# Altium PCB MaiChe.PcbDoc
Units mm, origin at the board's own origin, x right, y up, seen from the top; angles counter-clockwise.
Board outline 152.4 x 101.6 mm, 2 copper layers (Top Layer, Bottom Layer); 24 components, 22 nets, 92 pads, 4 vias.
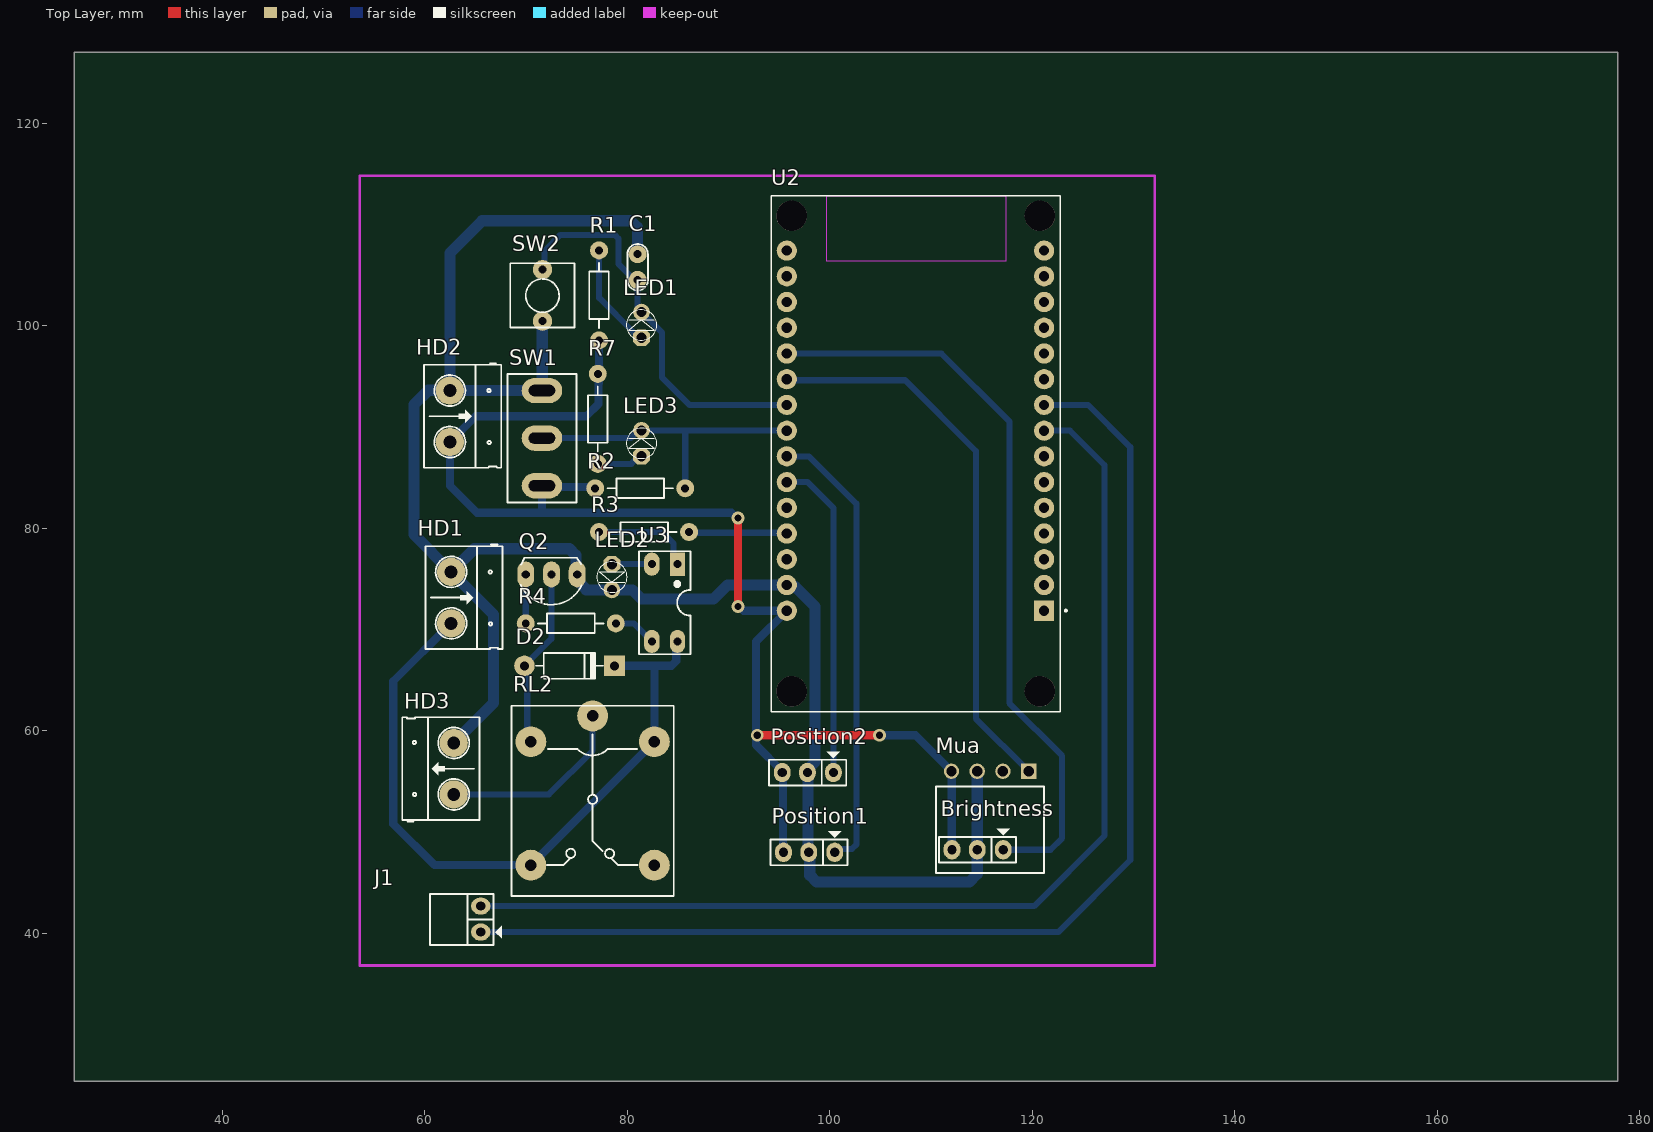
[diagram p0: Top Layer view]
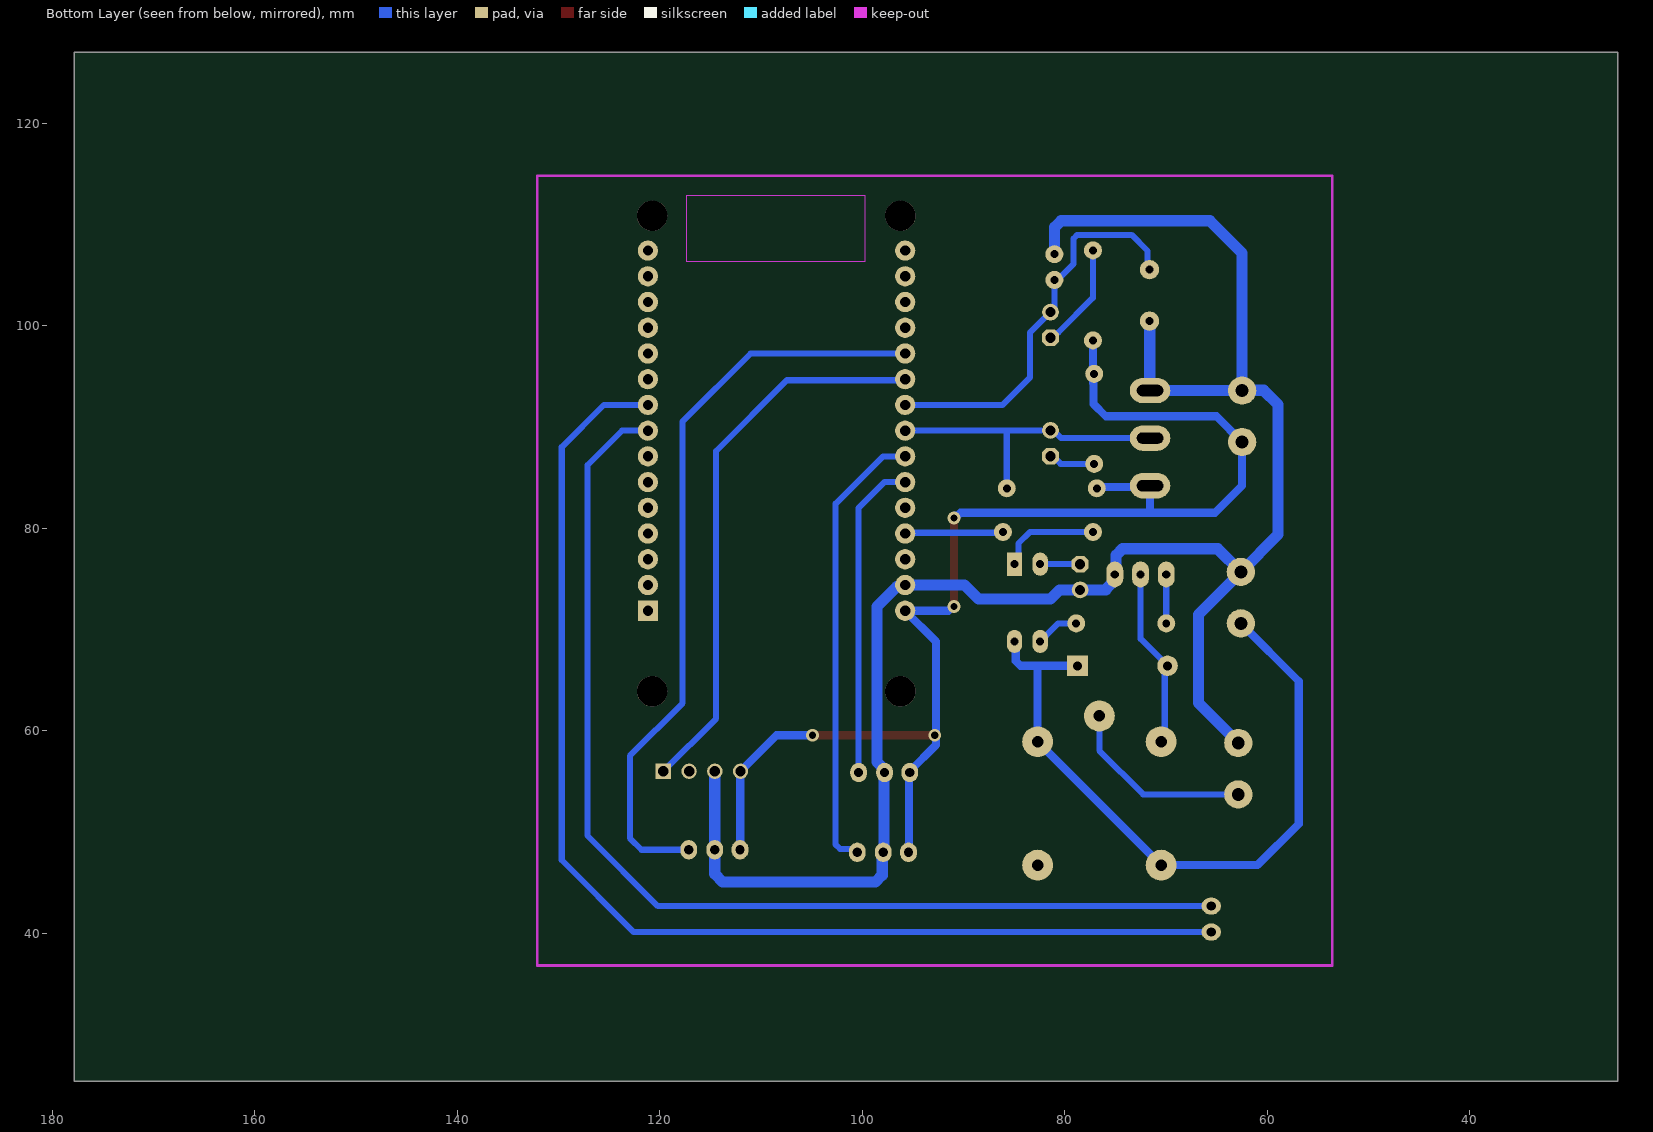
[diagram p1: Bottom Layer view, seen from below]
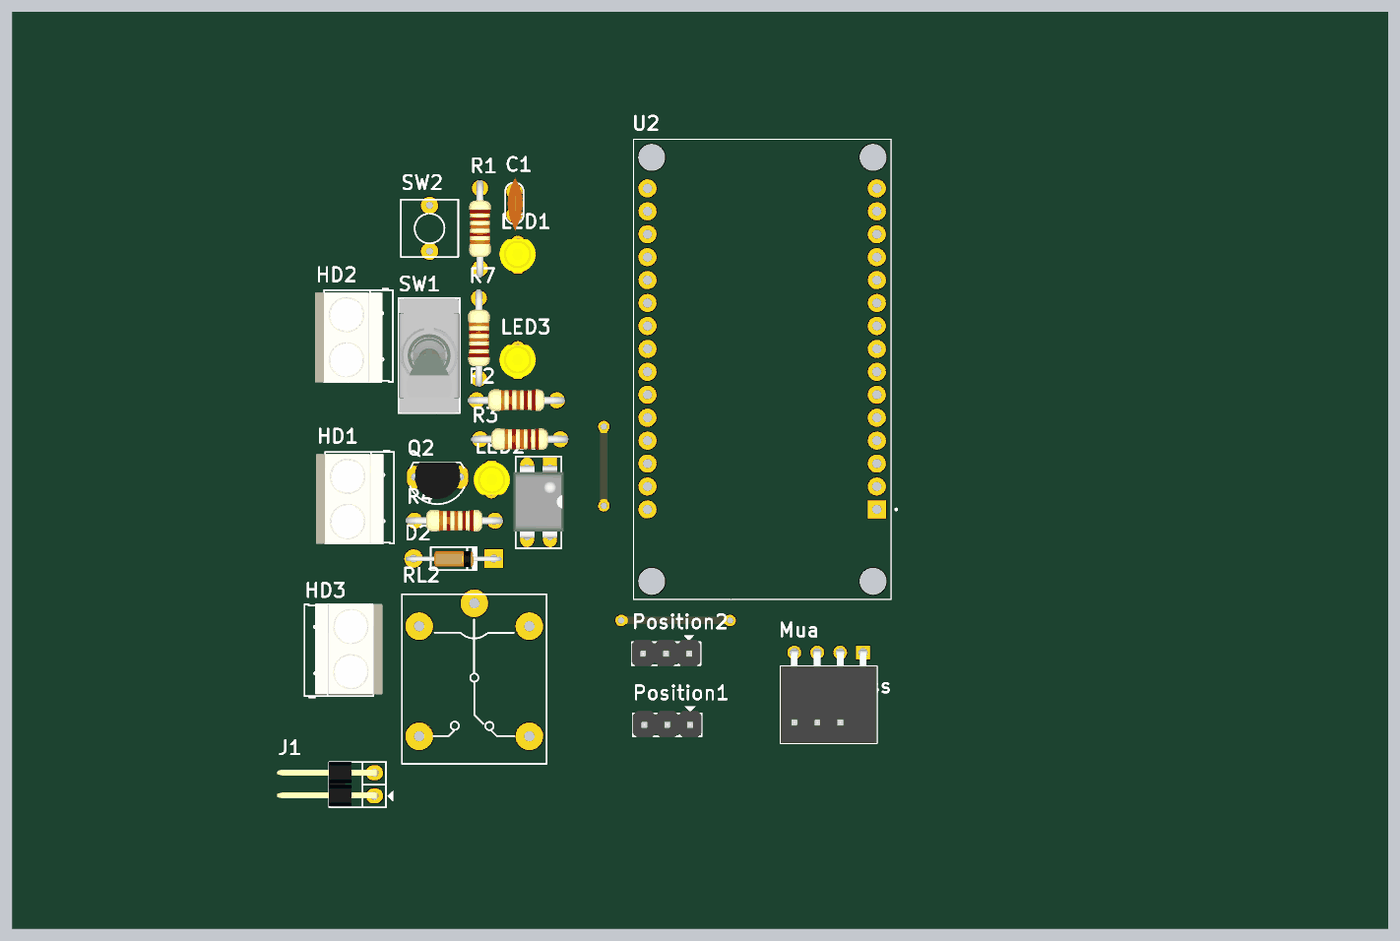
[diagram p2: 3D render of the assembled board from above, using the file's embedded part models]

## Layer stack, top to bottom
Top Solder: solder mask 0.0102, Solder Resist, Dk 3.5
Top Layer: signal copper 0.0356
Dielectric 1: dielectric 0.32, FR-4, Dk 4.8
Bottom Layer: signal copper 0.0356
Bottom Solder: solder mask 0.0102, Solder Resist, Dk 3.5

## Board outline
25.4,25.4 177.8,25.4 177.8,127 25.4,127

## Design rules (kind name [scope] priority, off if disabled: settings)
Clearance [All] p1: gap=0.254 ignorepadtopadclearanceinfootprint=FALSE except(0: Arc-Hole Track-Hole SMDPad-Hole THPad-Hole Via-Hole Fill-Hole Poly-Hole Region-Hole Text-Hole)
PolygonConnect [All] p1: connectstyle=Relief reliefconductorwidth=0.254 reliefentries=4 polygonreliefangle="90 Angle" airgapwidth=0.254
RoutingVias [All] p1: holewidth=0.711 width=1.27 viastyle="Through Hole" minholewidth=0.711 minwidth=1.27 maxholewidth=0.711 maxwidth=1.27
SolderMaskExpansion [All] p1: expansion=0.102 istentingtop=FALSE
Width VCC_3_3 [InNet('3.3V')] p1: maxlimit=0.9 minlimit=0.7 preferedwidth=0.8
Width VCC_12 [InNet('+12')] p2: maxlimit=0.9 minlimit=0.7 preferedwidth=0.8
Width VCC_5 [InNet('+5')] p3: maxlimit=0.9 minlimit=0.7 preferedwidth=0.8
Width GND [InNet('GND')] p4: maxlimit=1.2 minlimit=1 preferedwidth=1.1
Width [All] p5: maxlimit=0.7 minlimit=0.5 preferedwidth=0.6
30 further rules are at their usual default settings.

## Components (designator, comment, footprint, x,y, rotation, side; value= is the part's Value field where it differs from the comment)
Brightness "Jumper 3" JP3 114.579,48.26 r180 top value=J3
C1 "100pF" CN1 81.026,107.061 r270 top
D2 "1N4007" D1A 69.85,66.421 r180 top
HD1 "Header 2" HED2 62.611,75.692 r270 top
HD2 "Header 2" HED2 62.484,93.599 r270 top
HD3 "Header 2" HED2 62.865,53.721 r90 top
J1 "Jumper 2" jp2h 65.532,40.132 r90 top value="JP 2"
LED1 "LED" LED-3MM-YELLOW 81.407,98.806 r90 top value="LED 3 ly Single Colour"
LED2 "LED" LED-3MM-YELLOW 78.486,76.454 r270 top value="LED 3 ly Single Colour"
LED3 "LED" LED-3MM-YELLOW 81.407,87.122 r90 top value="LED 3 ly Single Colour"
Mua "JP 1x4 2.54" "JP 1x4 CC" 115.824,56.007 r180 top
Position1 "Jumper 3" JP3 97.942,48.006 r180 top value=J3
Position2 "Jumper 3" JP3 97.815,55.88 r180 top value=J3
Q2 "C1815" QTO-92 72.517,75.438 r180 top
R1 "330" R1/4W 77.216,98.552 r90 top value="R1/4W - 1K"
R2 "1k" R1/4W 76.835,83.947 r0 top value="R1/4W - 1K"
R3 "1k" R1/4W 77.216,79.629 r0 top value="R1/4W - 1K"
R4 "510" R1/4W 69.977,70.612 r0 top value="R1/4W - 1K"
R7 "330" R1/4W 77.089,95.25 r270 top value="R1/4W - 1K"
RL2 "Relay 10A/12V" RL_SPDT_10A 76.581,61.468 r270 top value="Relay SPDT, 10A, 12V"
SW1 "7103P3YZQE" SW_TOGGLE_7103P3YZQE 71.58,88.903 r270 top
SW2 "SW" SW2 71.628,100.457 r90 top value="SW chip 2 pin"
U2 "ESP32-DEVKIT-V1" MODULE_ESP32_DEVKIT_V1 108.458,87.376 r180 top
U3 "PC817" DIP4/W0.3 84.963,76.454 r180 top

## Footprints (in the part's own frame and the unit in brackets; to place one, negate y for a bottom-side part, rotate by r counter-clockwise, add the part's x,y. Pads: shape width x height; smd on the part's side, far side on the other; paste and mask are expansions set on the pad)
CN1 [mil]
  round 70 hole 31: 1(0,0) 2(100,0)
  silkscreen extent -40,-40 141,40, body extent -60,-30 170,37, height 265
D1A [mil] "Diode 1A, W 100mil, L 350mil"
  round 80 hole 35: 1(0,0)
  rect 80x80 hole 35: 2(-350,0)
  silkscreen extent -305,-50 -45,50, body extent -386,-33 34,36, height 84
DIP4/W0.3 [mil] "4 PIN, W 300mil, Pin to pin 100mil"
  rect 60x90 hole 31: 1(0,0)
  oval 60x90 hole 31: 2(100,0) 3(100,300) 4(0,300)
  silkscreen extent -50,-50 150,350, body extent -59,-10 159,305, height 170
HED2 [mil] "Header 2, 2 pin, hight 300mil, Pin to Pin 200, Colour Green"
  round 110 hole 50: 1(0,0) 2(200,0)
  silkscreen extent -106,-100 300,200, body extent -92,-140 302,155, height 394
jp2h [mil]
  oval 65x75 hole 36: 1(0,0) 2(101,0)
  silkscreen extent -50,-81 148,197, body extent -44,-14 148,424, height 99
JP3 [mil] "Jumper 3"
  oval 65x75 hole 36: 1(-100,0) 2(1,0) 3(99,0)
  silkscreen extent -150,-81 150,50, body extent -150,-60 150,55, height 355
"JP 1x4 CC" [mm]
  rect 1.52x1.52 hole 1.02: 1(-3.81,0)
  round 1.52 hole 1.02: 2(-1.27,0) 3(1.27,0) 4(3.81,0)
  silkscreen extent -5.33,1.52 5.33,10.03, body extent -5.33,-0.25 5.33,10.05, height 2.51
LED-3MM-YELLOW [mil]
  oct 65x65 hole 40: 1(0,0)
  round 65 hole 40: 2(100,0)
  silkscreen extent -9,-59 109,59, body extent -27,-77 117,80, height 181
MODULE_ESP32_DEVKIT_V1 [mm]
  rect 2x2 hole 1.02: 1(-12.7,15.515)
  round 2 hole 1.02: 2(-12.7,12.975) 3(-12.7,10.435) 4(-12.7,7.895) 5(-12.7,5.355) 6(-12.7,2.815) 7(-12.7,0.275) 8(-12.7,-2.265) 9(-12.7,-4.805) 10(-12.7,-7.345) 11(-12.7,-9.885) 12(-12.7,-12.425) 13(-12.7,-14.965) 14(-12.7,-17.505) 15(-12.7,-20.045) 16(12.7,-20.045) 17(12.7,-17.505) 18(12.7,-14.965) 19(12.7,-12.425) 20(12.7,-9.885) 21(12.7,-7.345) 22(12.7,-4.805) 23(12.7,-2.265) 24(12.7,0.275) 25(12.7,2.815) 26(12.7,5.355) 27(12.7,7.895) 28(12.7,10.435) 29(12.7,12.975) 30(12.7,15.515)
  round 3 hole 3 unplated: ""(-12.28,23.475) ""(-12.28,-23.475) ""(12.23,23.475) ""(12.23,-23.475)
  Keep-Out Layer region: 8.78,-25.475 -8.91,-25.475 -8.91,-18.985 8.78,-18.985
  Keep-Out Layer region: 8.78,-25.475 -8.91,-25.475 -8.91,-18.985 8.78,-18.985
  Keep-Out Layer region: 8.78,-25.475 -8.91,-25.475 -8.91,-18.985 8.78,-18.985
  silkscreen extent -14.95,-25.48 14.23,25.48
QTO-92 [mil] "TO-92"
  oval 66x100 hole 32: 1(-100,0) 2(0,0) 3(100,0)
  silkscreen extent -117,-65 120,118, body extent -109,-66 109,95, height 245
R1/4W [mil] "R 1/4W, 2 Pin, 350mil"
  round 70 hole 31: 1(0,0) 2(350,0)
  silkscreen extent 48,-38 302,38, body extent -40,-47 386,47, height 111
RL_SPDT_10A [mil] "Relay SPDT, 5 pin, 10A,W 650mil, L 800mil, H 800mil"
  round 120 hole 45: 1(0,0) 2(580,240) 3(580,-240) 4(100,-240) 5(100,240)
  silkscreen extent -40,-315 700,315
SW2 [mil] "SW button 2pin, 250x 250 mil"
  round 75 hole 31: 1(0,0) 2(200,0)
  silkscreen extent -25,-125 225,125
SW_TOGGLE_7103P3YZQE [mm]
  oval 2.5x4 hole 2.6 slot 1.1 at 0 deg: 1(-4.7,0) 2(0,0) 3(4.7,0)
  silkscreen extent -6.35,-3.4 6.35,3.4, body extent -6.35,-3.38 6.35,3.38, height 30.93

## Part data
Brightness Position1 Position2: library part JP3
C1: library part CN1, "Cap np  1pF - 472pF"
D2: library part D1A, "Diode 1A"
HD1 HD2 HD3: library part Hed2, "Header 2 (Green)"
J1: library part "JP 2"
LED1 LED2 LED3: "LED Single colour Green and Red"
Mua: library part "JP 1x4 2.54 Cai Cong", "Cắm", Chung_Loai=Cắm, Don_Vi=Con, Ma_Hang=MH001265, Ten_Linh_Kien="Jump Đơn Cái 2.54MM 1x40P Cong"
Q2: "NPN 600mW, ECB"
R1 R2 R3 R4 R7: library part R1/4W, "Resistor 1/4W"
RL2: library part "Relay 1", "Relay SPDT,10A - 12VDC 5 Pin"
SW1: library part SW_TOGGLE_7103P3YZQE, "SWITCH TOGGLE SPDT 5A 120V", Current Rating="5A (AC/DC)", Illumination Type, Color=-, Manufacturer=C&K, Operating Temperature="-30°C ~ 85°C", Supplier Part Number 1=CKN1024-ND, Actuator Length=11.43mm, Actuator Material="Brass, Chrome Plated", Actuator Type="Flat Anti-Rotation", Bushing Thread=1/4-40, Category=Switches, Circuit=SPDT, ComponentLink1Description=http://www.ckswitches.com/media/1394/7000toggle.pdf, ComponentLink1URL=http://www.ckswitches.com/media/1394/7000toggle.pdf, Electrical Life="40,000 Cycles", Features="Epoxy Sealed Terminals", Illumination=Non-Illuminated, Illumination Voltage (Nominal)=-, Ingress Protection=-, Manufacturer Part Number=7103P3YZQE, Mounting Type="Panel Mount", Packaging=Bulk, Panel Cutout Dimensions="Circular - 6.35mm Dia", Part Status=Active, Pricing 1="1=7.89, 10=7.496, 25=7.2984, 50=7.101, 100=6.9038, 250=6.50924, 500=5.523, 1000=5.22713 (USD)", RoHS="RoHS Compliant", Stock 1=335, Supplier 1=Digi-Key, Switch Function=On-Off-On, Termination Style="Solder Lug"
SW2: library part SW2, "Switch button 2 pin"
U2: "Dual core, Wi-Fi: 2.4 GHz up to 150 Mbits/s,BLE (Bluetooth Low Energy) and legacy Bluetooth, 32 bits, Up to 240 MHz", Package=None, Availability="Not in stock", Check_prices=https://www.snapeda.com/parts/ESP32-DEVKIT-V1/Do+it/view-part/?ref=eda, MF="Do it", MP=ESP32-DEVKIT-V1, Price=None, SnapEDA_Link=https://www.snapeda.com/parts/ESP32-DEVKIT-V1/Do+it/view-part/?ref=snap
U3: "Single Opto"

## Via types
v1: diameter 1.27, hole 0.711, Top Layer to Bottom Layer, 4 vias

## Nets (pads, with @x,y where several pads share a name; then routed paths per layer and width w, separated by ;. In a path a pad name is that pad's centre, name@x,y a point inside that pad or via, vN(x,y) a via of type N, cw(c..) or ccw(c..) an arc to the next point about the centre after c; other vN are vias at no path point)
+5: Brightness.3 HD2.2 Mua.4 Position1.3 Position2.3 R1.1 R2.1 R7.1 SW1.3 U2.30 | length 133
  Top Layer w0.8: v1@90.932,72.39 v1(90.932,81.026) ; v1(92.837,59.563) v1(104.902,59.563)
  Bottom Layer w0.8: R2.1 76.707,84.075 71.708,84.075 SW1.3 71.58,81.582 71.628,81.534 ; R1.1 77.216,94.361 77.159,94.304 77.159,92.272 75.946,91.059 65.024,91.059 HD2.2 62.484,84.201 65.151,81.534 71.628,81.534 ; v1@90.842,81.243 90.715,81.116 90.297,81.534 71.628,81.534 ; v1(90.932,72.263) 91.059,72.263 91.461,71.861 U2.30 92.71,68.813 92.71,58.598 95.301,56.007 Position2.3 95.364,55.816 95.364,48.069 Position1.3 Position1.3@95.491,48.069 ; v1(104.902,59.563) 108.458,59.563 Mua.4 112.039,55.982 112.039,48.285 Brightness.3 Brightness.3@112.039,48.235
+12: D2.2 HD1.2 RL2.3 RL2.5 U3.4 | length 70.5
  Bottom Layer w0.8: HD1.2 56.896,64.897 56.896,50.8 60.96,46.736 RL2.3 RL2.5 82.677,66.421 ; D2.2 82.677,66.421 ; U3.4 84.836,68.707 84.836,66.89 84.367,66.421 82.677,66.421
DATA1: Position1.1 U2.24 | length 44.9
  Bottom Layer w0.6: U2.24 97.938,87.101 102.616,82.423 102.616,48.768 102.182,48.334 100.81,48.334 Position1.1
DATA2: Position2.1 U2.25 | length 31.8
  Bottom Layer w0.6: U2.25 97.811,84.561 100.355,82.017 Position2.1
DATA_Bright: Brightness.1 U2.20 | length 74.3
  Bottom Layer w0.6: U2.20 111.019,97.261 117.729,90.551 117.729,62.738 122.936,57.531 122.936,49.403 121.793,48.26 Brightness.1
DATA_Mua: Mua.1 U2.21 | length 55.4
  Bottom Layer w0.6: U2.21 95.864,94.615 107.442,94.615 114.427,87.63 114.427,61.214 Mua.1
GND: Brightness.2 C1.1 HD1.1 HD2.1 HD3.2 LED2.2 Mua.3 Position1.2 Position2.2 Q2.1 SW1.1 SW2.1 U2.29 | length 190.2
  Bottom Layer w1.1: HD3.2 66.802,62.738 66.802,71.501 HD1.1 ; SW2.1 71.604,100.433 71.604,93.627 SW1.1 71.578,93.601 62.486,93.601 HD2.1 ; Q2.1@75.057,74.85 75.819,74.088 75.819,74.041 75.946,73.914 80.518,73.914 81.407,73.025 88.519,73.025 89.895,74.401 U2.29 95.93,74.229 96.586,74.229 98.552,72.263 98.552,62.967 98.552,56.918 97.79,56.156 Position2.2 97.853,55.816 97.853,48.069 Position1.2 98.022,47.901 98.022,45.742 98.679,45.085 113.792,45.085 114.554,45.847 Brightness.2 Mua.3 ; Q2.1 75.057,76.026 74.93,76.153 74.93,77.334 74.286,77.978 64.897,77.978 HD1.1 ; C1.1 81.026,109.719 80.382,110.363 65.659,110.363 62.484,107.188 HD2.1 ; HD2.1 62.459,93.624 60.35,93.624 58.928,92.202 58.928,79.375 HD1.1
INT1: J1.2 U2.8 | length 108.4
  Bottom Layer w0.6: J1.2 120.167,42.697 127.127,49.657 127.127,86.233 123.719,89.641 U2.8
INT2: J1.1 U2.9 | length 118.1
  Bottom Layer w0.6: J1.1 122.555,40.132 129.667,47.244 129.667,88.011 125.497,92.181 U2.9
INT3: U2.10
INT4: U2.11
MODE: LED3.2 R2.2 SW1.2 U2.23 | length 29.4
  Bottom Layer w0.6: SW1.2 80.364,88.903 81.123,89.662 LED3.2 ; 82.275,89.641 85.598,89.641 ; R2.2 85.725,89.514 85.598,89.641 ; U2.23 85.598,89.641
MOTOR1: R3.2 U2.27 | length 10.1
  Bottom Layer w0.6: R3.2 86.18,79.555 95.684,79.555 U2.27 U2.27@96.026,79.213
NetD2_1: D2.1 Q2.2 RL2.4 | length 17.9
  Bottom Layer w0.6: RL2.4 70.124,59.289 70.124,66.147 D2.1 72.517,69.088 Q2.2
NetHD3_1: HD3.1 RL2.1 | length 18.9
  Bottom Layer w0.6: HD3.1 72.263,53.721 76.581,58.039 RL2.1
NetLED1_1: LED1.1 R1.2 | length 10.1
  Bottom Layer w0.6: R1.2 77.216,102.743 80.627,99.332 80.644,99.332 80.881,99.094 80.933,99.094 LED1.1@81.026,99.187
NetLED2_1: LED2.1 U3.2 | length 3.9
  Bottom Layer w0.6: LED2.1 U3.2
NetLED3_1: LED3.1 R7.2 | length 4.8
  Bottom Layer w0.6: R7.2 80.408,86.36 81.17,87.122 LED3.1 LED3.1@81.28,86.995
NetQ2_3: Q2.3 R4.1 | length 4.8
  Bottom Layer w0.6: R4.1 Q2.3
NetR3_1: R3.1 U3.1 | length 10
  Bottom Layer w0.6: R3.1 83.439,79.629 84.571,78.497 84.571,76.846 U3.1
NetR4_2: R4.2 U3.3 | length 4.4
  Bottom Layer w0.6: R4.2 78.878,70.601 80.656,70.601 81.865,69.392 81.996,69.392 82.423,68.965 U3.3
Reset: C1.2 LED1.2 SW2.2 U2.22 | length 39.2
  Bottom Layer w0.6: SW2.2 71.829,105.738 71.829,107.389 73.406,108.966 78.77,108.966 79.121,108.615 79.121,106.107 80.707,104.521 C1.2 81.026,101.727 83.439,99.314 83.439,94.869 86.127,92.181 U2.22
pads on no net: Mua.2 RL2.2 U2. U2.1 U2.2 U2.3 U2.4 U2.5 U2.6 U2.7 U2.12 U2.13 U2.14 U2.15 U2.16 U2.17 U2.18 U2.19 U2.26 U2.28

## Keep-outs
Keep-Out Layer:
  lines w0.254: 53.594,114.808 53.594,108.712 ; 54.102,114.808 53.721,114.808 132.08,114.808 132.08,36.83 53.594,36.83 53.594,39.878 53.594,108.712 ; 53.594,108.712 53.594,108.712